# Altium PCB evacc_v3_1.PcbDoc (part 5 of 5)
Units mm, origin at the board's own origin, x right, y up, seen from the top; angles counter-clockwise.
Board outline 160 x 215 mm, 2 copper layers (Top Layer, Bottom Layer), stack 1.671 mm thick; 227 components, 143 nets, 622 pads, 320 vias.
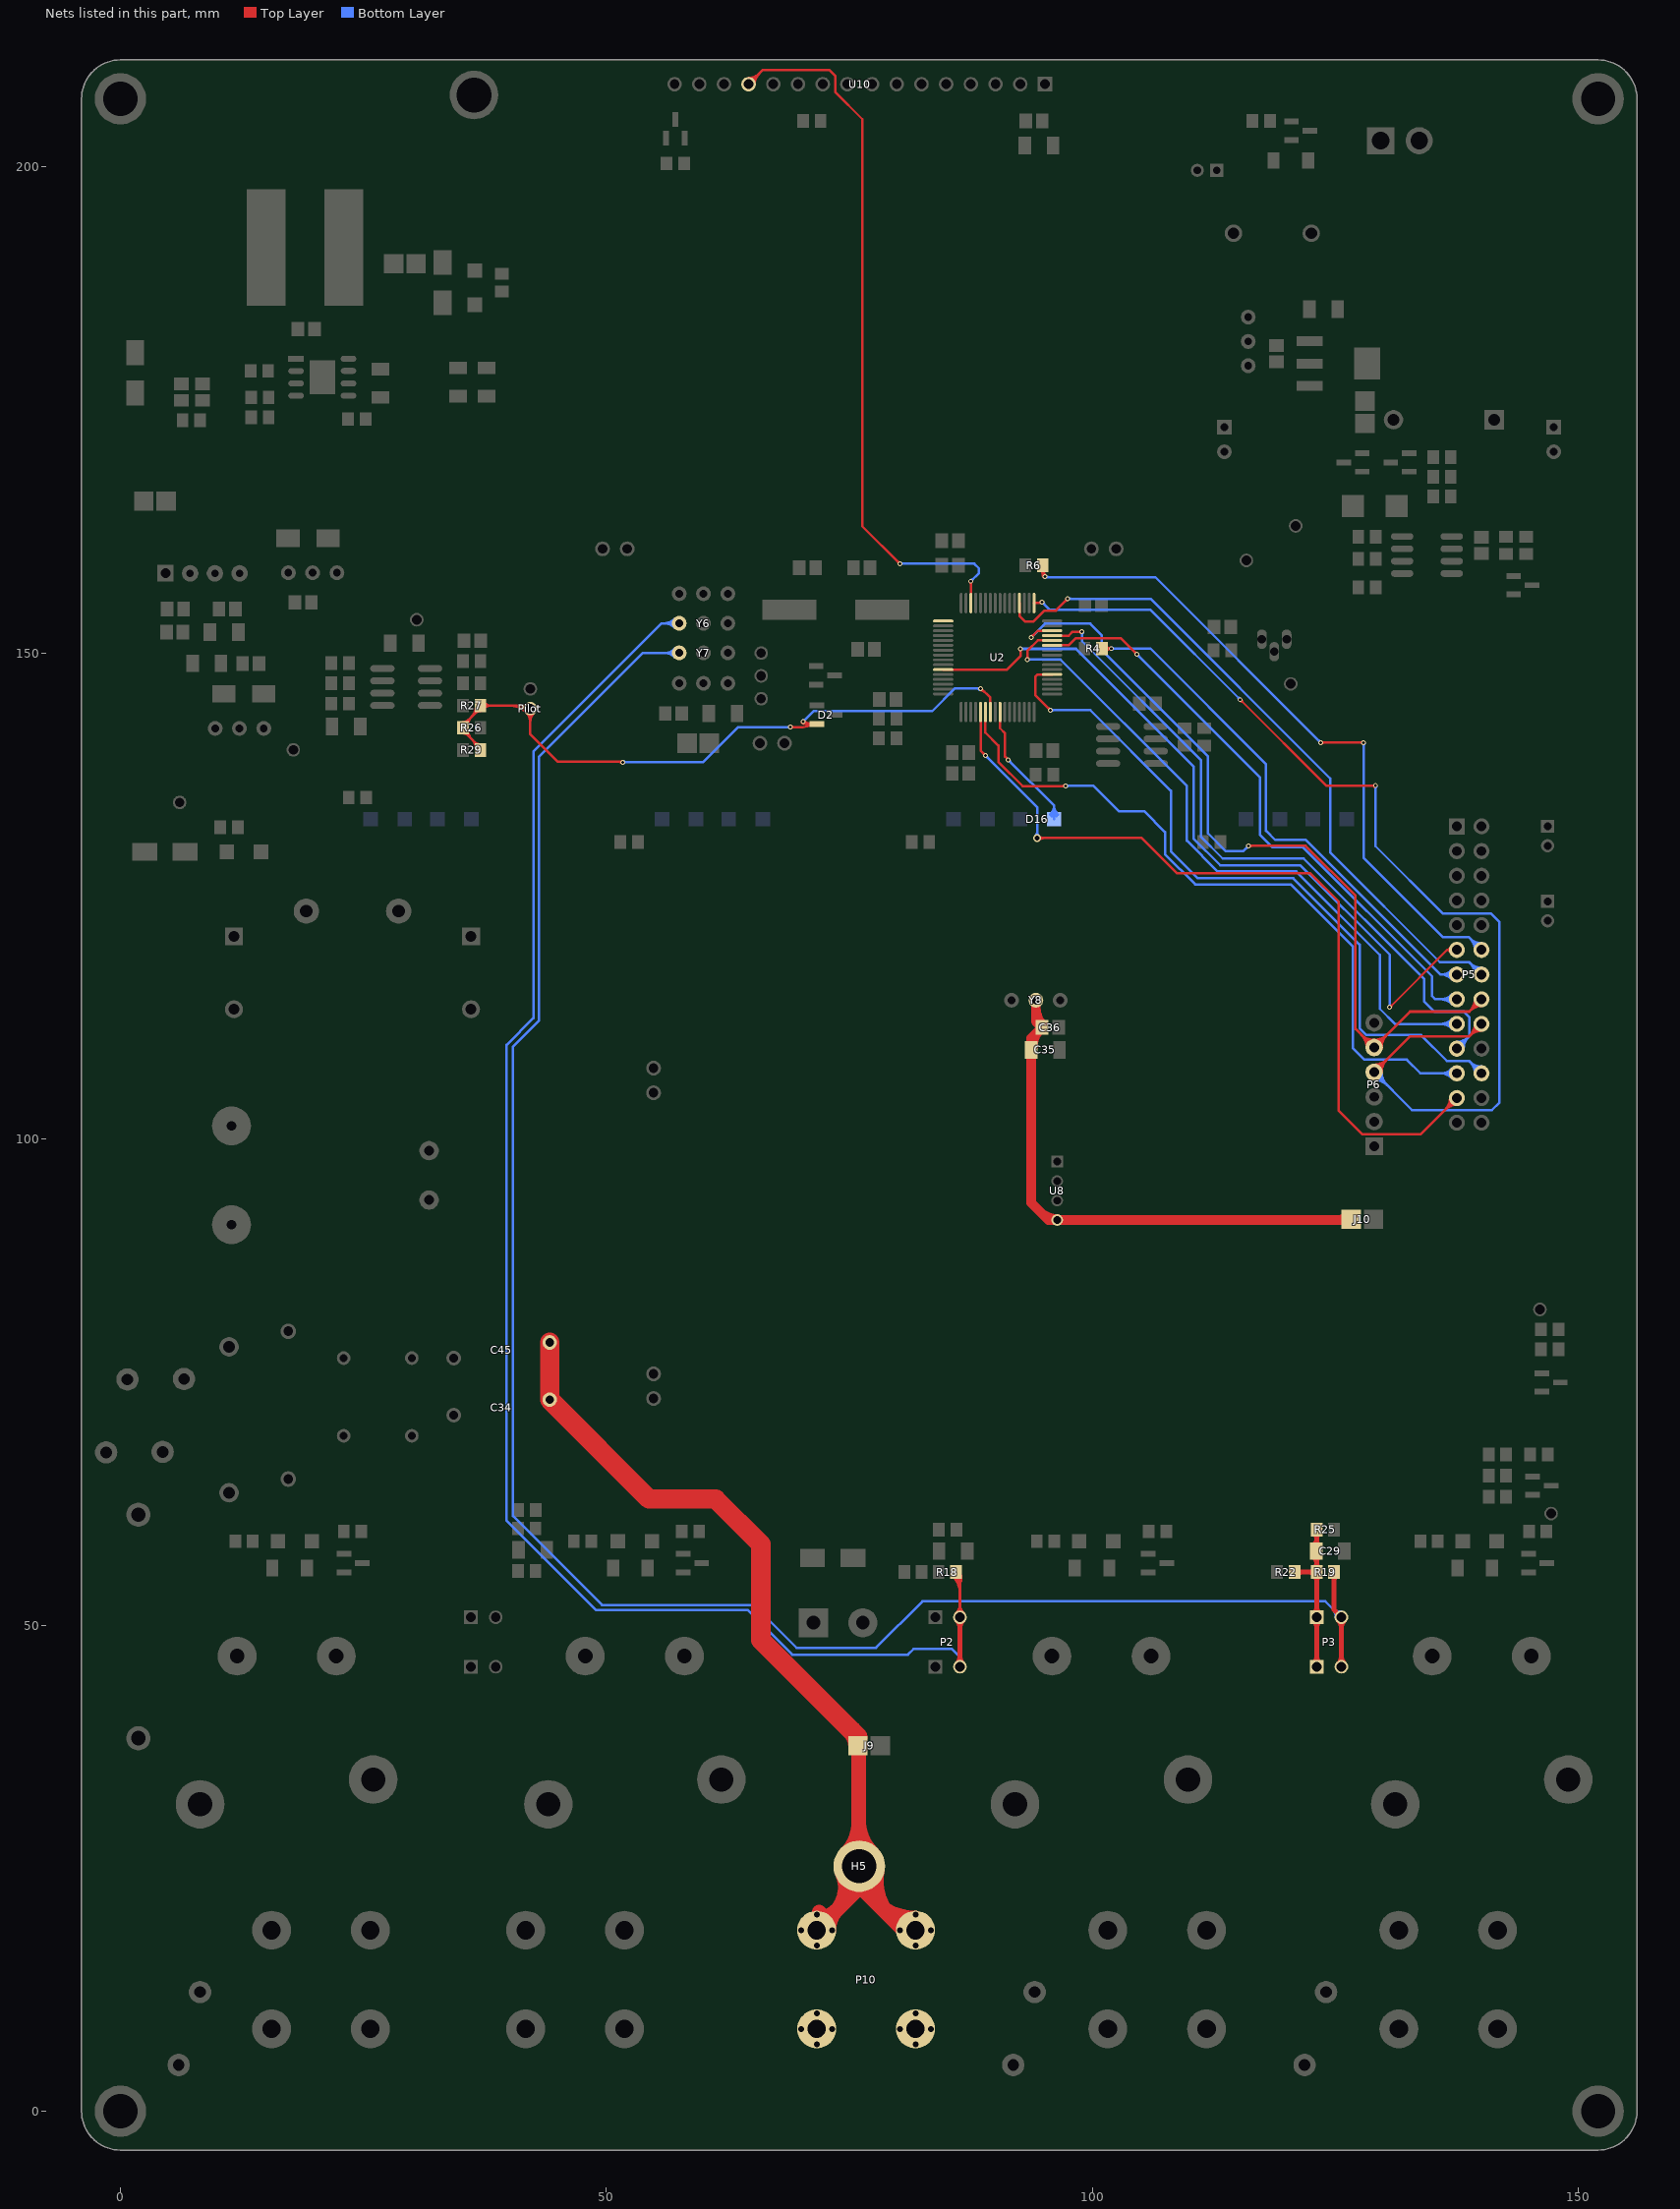
[diagram p5: the nets of this part, all layers, seen from the top]

## Via types
v1: diameter 0.8, hole 0.5, Top Layer to Bottom Layer, 150 vias
v2: diameter 0.8, hole 0.6, Top Layer to Bottom Layer, 80 vias
v3: diameter 0.5, hole 0.3, Top Layer to Bottom Layer, 53 vias
v4: diameter 1.27, hole 0.711, Top Layer to Bottom Layer, 20 vias
v5: diameter 1.2, hole 0.7, Top Layer to Bottom Layer, 13 vias
v6: diameter 1.2, hole 0.8, Top Layer to Bottom Layer, 4 vias

## Nets (pads, with @x,y where several pads share a name; then routed paths per layer and width w, separated by ;. In a path a pad name is that pad's centre, name@x,y a point inside that pad or via, vN(x,y) a via of type N, cw(c..) or ccw(c..) an arc to the next point about the centre after c; other vN are vias at no path point) (continued)
P2-: P2.2 R18.2 Y6.1 | length 199.7
  Top Layer w0.254: R18.2@85.581,55.45 85.772,55.259 86.36,54.671 P2.2@86.36,50.8 ; 86.36,51.57 cw(c85.59,51.57) 86.134,51.026 ccw(c85.59,51.57) 86.36,51.57 ; 86.36,51.57 ccw(c87.13,51.57) 86.586,51.026 cw(c87.13,51.57) 86.36,51.57 ; 86.36,52.183 cw(c84.977,52.183) 85.955,51.205 ccw(c84.977,52.183) 86.36,52.183 ; 86.36,52.183 ccw(c87.743,52.183) 86.765,51.205 cw(c87.743,52.183) 86.36,52.183 ; R18.2@85.628,55.016 cw(c83.859,53.247) 86.36,53.247 ccw(c83.859,53.247) R18.2@85.628,55.016 ; R18.2@85.807,55.195 cw(c84.473,53.86) 86.36,53.86 ccw(c84.473,53.86) R18.2@85.807,55.195 ; R18.2@85.987,55.375 cw(c85.086,54.474) 86.36,54.474 ccw(c85.086,54.474) R18.2@85.987,55.375
  Top Layer w0.5: R18.2@85.962,55.45 86.36,55.052 86.36,54.671 ; P2.2@86.36,45.72 P2.2@86.36,50.8 ; 86.36,46.806 cw(c85.274,46.806) 86.042,46.038 ccw(c85.274,46.806) 86.36,46.806 ; 86.36,46.806 ccw(c87.446,46.806) 86.678,46.038 cw(c87.446,46.806) 86.36,46.806 ; 86.36,49.714 cw(c87.446,49.714) 86.678,50.482 ccw(c87.446,49.714) 86.36,49.714 ; 86.36,49.714 ccw(c85.274,49.714) 86.042,50.482 cw(c85.274,49.714) 86.36,49.714 ; R18.2@85.944,55 cw(c85.922,54.563) 86.36,54.563 ccw(c85.922,54.563) R18.2@85.944,55
  Bottom Layer w0.254: Y6.1@57.483,153.048 55.69,153.048 42.483,139.841 42.483,112.435 39.726,109.677 39.726,60.731 48.895,51.562 64.516,51.562 69.113,46.965 81.001,46.965 81.585,47.549 85.547,47.549 86.36,46.736 ; P2.2@86.36,45.72 86.36,46.736 ; 55.95,153.048 cw(c55.95,151.515) 57.034,152.599 ccw(c55.95,151.515) 55.95,153.048 ; 55.95,153.048 ccw(c55.95,154.581) 57.034,153.497 cw(c55.95,154.581) 55.95,153.048 ; 56.563,153.048 cw(c56.563,152.128) 57.213,152.779 ccw(c56.563,152.128) 56.563,153.048 ; 56.563,153.048 ccw(c56.563,153.968) 57.213,153.318 cw(c56.563,153.968) 56.563,153.048 ; 86.36,46.736 cw(c85.746,46.736) 86.064,46.21 ccw(c85.746,46.736) 86.36,46.736 ; 86.36,46.736 ccw(c86.974,46.736) 86.656,46.21 cw(c86.974,46.736) 86.36,46.736
P3+: C29.2 P3.1 R19.1 R22.1 R25.2 | length 52.5
  Top Layer w0.254: C29.2@123.01,57.609 123.01,56.533 ; R19.1@123.052,55.45 123.052,56.491 ; 123.01,56.533 cw(c123.4,56.533) 123.233,56.886 ccw(c123.4,56.533) 123.01,56.533 ; 123.01,56.533 ccw(c122.62,56.533) 122.787,56.886 cw(c122.62,56.533) 123.01,56.533 ; 123.01,56.533 123.052,56.491 ; 123.052,56.491 cw(c122.352,56.491) 122.77,55.929 ccw(c122.352,56.491) 123.052,56.491 ; 123.052,56.491 ccw(c123.752,56.491) 123.334,55.929 cw(c123.752,56.491) 123.052,56.491
  Top Layer w0.5: R22.1@120.788,55.45 R19.1@123.052,55.45 ; P3.1@123.063,45.72 P3.1@123.063,50.8 123.063,55.45 123.063,57.609 R25.2@123.063,59.806 ; 121.633,55.45 cw(c121.633,56.295) 121.036,55.697 ccw(c121.633,56.295) 121.633,55.45 ; 121.633,55.45 ccw(c121.633,54.605) 121.036,55.202 cw(c121.633,54.605) 121.633,55.45 ; 122.207,55.45 cw(c122.207,54.605) 122.804,55.202 ccw(c122.207,54.605) 122.207,55.45 ; 122.207,55.45 ccw(c122.207,56.295) 122.804,55.697 cw(c122.207,56.295) 122.207,55.45 ; 123.063,46.806 cw(c121.977,46.806) 122.745,46.038 ccw(c121.977,46.806) 123.063,46.806 ; 123.063,46.806 ccw(c124.149,46.806) 123.381,46.038 cw(c124.149,46.806) 123.063,46.806 ; 123.063,49.714 cw(c124.149,49.714) 123.381,50.482 ccw(c124.149,49.714) 123.063,49.714 ; 123.063,49.714 ccw(c121.977,49.714) 122.745,50.482 cw(c121.977,49.714) 123.063,49.714 ; 123.063,51.886 cw(c121.977,51.886) 122.745,51.118 ccw(c121.977,51.886) 123.063,51.886 ; 123.063,51.886 ccw(c124.149,51.886) 123.381,51.118 cw(c124.149,51.886) 123.063,51.886 ; C29.2@122.727,57.076 cw(c121.916,56.265) 123.063,56.265 ccw(c121.916,56.265) C29.2@122.727,57.076 ; C29.2@122.727,58.142 ccw(c121.916,58.953) 123.063,58.953 cw(c121.916,58.953) C29.2@122.727,58.142 ; R19.1@122.804,55.102 cw(c122.18,54.478) 123.063,54.478 ccw(c122.18,54.478) R19.1@122.804,55.102 ; R19.1@122.804,55.797 ccw(c122.18,56.422) 123.063,56.422 cw(c122.18,56.422) R19.1@122.804,55.797 ; R25.2@122.804,59.47 cw(c122.18,58.845) 123.063,58.845 ccw(c122.18,58.845) R25.2@122.804,59.47 ; 123.063,54.532 cw(c123.87,54.532) 123.299,55.102 ccw(c123.87,54.532) 123.063,54.532 ; 123.063,56.368 ccw(c123.87,56.368) 123.299,55.797 cw(c123.87,56.368) 123.063,56.368 ; 123.063,56.521 cw(c123.848,56.521) 123.293,57.076 ccw(c123.848,56.521) 123.063,56.521 ; 123.063,58.697 ccw(c123.848,58.697) 123.293,58.142 cw(c123.848,58.697) 123.063,58.697 ; 123.063,58.899 cw(c123.87,58.899) 123.299,59.47 ccw(c123.87,58.899) 123.063,58.899
P3-: P3.2 R19.2 Y7.1 | length 225.5
  Top Layer w0.5: R19.2@124.852,55.45 124.852,51.551 P3.2@125.603,50.8 P3.2@125.603,45.72 ; 124.852,54.505 cw(c125.697,54.505) 125.1,55.102 ccw(c125.697,54.505) 124.852,54.505 ; 124.852,54.505 ccw(c124.007,54.505) 124.605,55.102 cw(c124.007,54.505) 124.852,54.505 ; 125.603,46.806 cw(c124.517,46.806) 125.285,46.038 ccw(c124.517,46.806) 125.603,46.806 ; 125.603,46.806 ccw(c126.689,46.806) 125.921,46.038 cw(c126.689,46.806) 125.603,46.806 ; 125.603,49.714 cw(c126.689,49.714) 125.921,50.482 ccw(c126.689,49.714) 125.603,49.714 ; 125.603,49.714 ccw(c124.517,49.714) 125.285,50.482 cw(c124.517,49.714) 125.603,49.714
  Bottom Layer w0.254: Y7.1@57.483,150 53.734,150 43.04,139.306 43.04,112.154 40.386,109.499 40.386,61.214 49.53,52.07 65.151,52.07 69.545,47.676 77.724,47.676 82.499,52.451 123.952,52.451 P3.2@125.603,50.8 ; 55.95,150 cw(c55.95,148.467) 57.034,149.551 ccw(c55.95,148.467) 55.95,150 ; 55.95,150 ccw(c55.95,151.533) 57.034,150.449 cw(c55.95,151.533) 55.95,150 ; 56.563,150 cw(c56.563,149.08) 57.213,149.731 ccw(c56.563,149.08) 56.563,150 ; 56.563,150 ccw(c56.563,150.92) 57.213,150.27 cw(c56.563,150.92) 56.563,150 ; 124.625,51.778 cw(c123.647,50.8) 125.03,50.8 ccw(c123.647,50.8) 124.625,51.778 ; 124.625,51.778 ccw(c125.603,52.756) 125.603,51.373 cw(c125.603,52.756) 124.625,51.778 ; 125.058,51.345 cw(c124.514,50.8) 125.284,50.8 ccw(c124.514,50.8) 125.058,51.345 ; 125.058,51.345 ccw(c125.603,51.889) 125.603,51.119 cw(c125.603,51.889) 125.058,51.345
PE: C34.2 C45.1 H5.0 J9.2 P10.1 P10.2 | length 170.4
  Top Layer w1: J9.2@75.863,37.592 J9.2@75.863,38.488
  Top Layer w1.5: P10.1@71.629,18.62 72.429,19.42 H5.0@75.946,22.937 ; J9.2@75.863,37.592 75.946,37.668 75.946,37.592 75.946,25.2 75.946,23.241 80.378,18.809 80.567,18.62 P10.2@81.789,18.62 ; P10.1@71.629,19.87 ccw(c71.629,22.888) 73.762,20.754 ; P10.1@71.629,19.87 ccw(c71.629,22.888) 73.762,20.754 ; P10.1@71.629,19.87 ccw(c71.629,22.888) 73.762,20.754 ; P10.1@71.629,19.87 ccw(c71.629,22.888) 73.762,20.754 ; P10.1@71.876,20.467 cw(c70.542,19.134) P10.1@72.429,19.134 ; P10.1@71.876,20.467 cw(c70.542,19.134) P10.1@72.429,19.134 ; P10.1@71.876,20.467 cw(c70.542,19.134) P10.1@72.429,19.134 ; P10.1@71.876,20.467 cw(c70.542,19.134) P10.1@72.429,19.134 ; P10.1@72.879,18.62 cw(c75.896,18.62) 73.762,20.754 ; P10.1@72.879,18.62 cw(c75.896,18.62) 73.762,20.754 ; P10.1@72.879,18.62 cw(c75.896,18.62) 73.762,20.754 ; P10.1@72.879,18.62 cw(c75.896,18.62) 73.762,20.754 ; 73.533,20.524 ccw(c71.047,23.01) 74.262,24.432 cw(c71.047,23.01) 73.533,20.524 ; H5.0@74.656,26.544 ccw(c71.543,29.657) 75.946,29.657 cw(c71.543,29.657) H5.0@74.656,26.544 ; 75.08,22.072 ccw(c73.193,23.959) 75.634,25.038 cw(c73.193,23.959) 75.08,22.072 ; 75.946,29.917 ccw(c80.717,29.917) 77.344,26.544 cw(c80.717,29.917) 75.946,29.917 ; H5.0@76.392,25.121 ccw(c79.994,24.391) 77.395,21.792 cw(c79.994,24.391) H5.0@76.392,25.121 ; 77.57,21.618 ccw(c81.788,25.837) 81.789,19.87 cw(c81.788,25.837) 77.57,21.618 ; H5.0@77.862,24.823 ccw(c83.28,23.725) 79.371,19.816 cw(c83.28,23.725) H5.0@77.862,24.823
  Top Layer w2: C45.1@44.161,79.07 C34.2@44.161,73.19 54.385,62.967 61.239,62.967 65.888,58.318 65.888,48.463 J9.2@75.863,38.488 ; 75.229,39.122 cw(c73.7,37.592) J9.2@75.863,37.592
  other v2: 71.629,6.86 81.789,6.86 70.029,8.46 73.229,8.46 80.189,8.46 83.389,8.46 71.629,10.06 81.789,10.06 71.629,17.02 81.789,17.02 70.029,18.62 73.229,18.62 80.189,18.62 83.389,18.62 71.629,20.22 81.789,20.22
PILOT: D2.2 Pilot.1 R26.1 R27.2 R29.2 U2.23 | length 133.1
  Top Layer w0.254: R29.2@37.031,140.017 37.031,140.236 35.231,142.036 R26.1@35.231,142.303 R26.1@35.231,142.521 ; R27.2@37.031,144.589 R27.2@37.031,144.346 ; v3(51.689,138.76) 51.689,138.802 51.68,138.811 44.983,138.811 42.164,141.63 Pilot.1@42.164,144.272 41.847,144.589 37.274,144.589 37.153,144.468 R27.2@37.031,144.346 ; v3(68.935,142.369) 70.216,142.369 D2.2@71.633,142.687 70.457,142.687 v3(70.216,142.928) ; v3(88.468,146.304) 88.585,146.304 89.484,145.405 U2.23@89.484,143.932 ; R26.1@35.231,142.521 35.231,142.546 R27.2@37.031,144.346 ; R26.1@35.231,142.521 37.031,144.321 R27.2@37.031,144.346 ; R26.1@35.231,142.876 ccw(c35.231,143.733) 35.837,143.127 cw(c35.231,143.733) R26.1@35.231,142.876 ; R26.1@35.231,142.876 ccw(c35.231,143.673) 35.794,143.109 cw(c35.231,143.673) R26.1@35.231,142.876 ; R26.1@35.45,142.403 cw(c36.264,142.403) 35.688,142.979 ccw(c36.264,142.403) R26.1@35.45,142.403 ; R26.1@35.45,142.403 cw(c36.324,142.403) 35.706,143.021 ccw(c36.324,142.403) R26.1@35.45,142.403 ; R26.1@35.704,142.403 cw(c37.131,142.403) 36.122,143.412 ccw(c37.131,142.403) R26.1@35.704,142.403 ; R26.1@35.704,142.403 cw(c37.191,142.403) 36.14,143.455 ccw(c37.191,142.403) R26.1@35.704,142.403 ; R27.2@36.558,144.489 cw(c35.011,144.489) 36.105,143.395 ccw(c35.011,144.489) R27.2@36.558,144.489 ; R27.2@36.558,144.489 cw(c35.071,144.489) 36.122,143.437 ccw(c35.071,144.489) R27.2@36.558,144.489 ; R27.2@36.812,144.489 cw(c35.878,144.489) 36.538,143.829 ccw(c35.878,144.489) R27.2@36.812,144.489 ; R27.2@36.812,144.489 cw(c35.938,144.489) 36.556,143.871 ccw(c35.938,144.489) R27.2@36.812,144.489 ; R27.2@37.031,144.016 ccw(c37.031,143.279) 36.51,143.8 cw(c37.031,143.279) R27.2@37.031,144.016 ; R27.2@37.031,144.016 ccw(c37.031,143.219) 36.468,143.783 cw(c37.031,143.219) R27.2@37.031,144.016 ; 38.173,144.589 cw(c38.173,145.731) 37.365,144.924 ccw(c38.173,145.731) 38.173,144.589 ; 38.173,144.589 ccw(c38.173,143.447) 37.365,144.255 cw(c38.173,143.447) 38.173,144.589 ; Pilot.1@41.759,143.867 ccw(c40.015,142.123) 40.015,144.589 cw(c40.015,142.123) Pilot.1@41.759,143.867 ; Pilot.1@41.759,143.867 cw(c40.781,142.889) 42.164,142.889 ; Pilot.1@41.759,143.867 cw(c40.781,142.889) 42.164,142.889 ; Pilot.1@41.938,144.046 ccw(c40.628,142.736) 40.628,144.589 cw(c40.628,142.736) Pilot.1@41.938,144.046 ; Pilot.1@41.938,144.046 cw(c41.394,143.502) 42.164,143.502 ; Pilot.1@41.938,144.046 cw(c41.394,143.502) 42.164,143.502 ; 42.164,142.889 cw(c43.547,142.889) 42.569,143.867 ccw(c43.547,142.889) 42.164,142.889 ; 42.164,143.502 cw(c42.934,143.502) 42.39,144.046 ccw(c42.934,143.502) 42.164,143.502 ; 69.232,142.369 cw(c69.232,142.666) 69.022,142.456 ccw(c69.232,142.666) 69.232,142.369 ; 69.232,142.369 ccw(c69.232,142.072) 69.022,142.282 cw(c69.232,142.072) 69.232,142.369 ; 70.765,142.687 cw(c70.765,142.269) 71.061,142.565 ccw(c70.765,142.269) 70.765,142.687 ; 70.765,142.687 ccw(c70.765,143.105) 71.061,142.809 cw(c70.765,143.105) 70.765,142.687 ; R26.1@35.231,141.73 cw(c35.231,140.992) 35.753,141.514 ccw(c35.231,140.992) R26.1@35.231,141.73 ; R26.1@35.45,142.203 ccw(c36.383,142.203) 35.723,141.543 cw(c36.383,142.203) R26.1@35.45,142.203 ; R26.1@35.704,142.203 ccw(c37.25,142.203) 36.157,141.11 cw(c37.25,142.203) R26.1@35.704,142.203 ; 36.14,141.127 cw(c35.13,140.117) 36.558,140.117 ccw(c35.13,140.117) 36.14,141.127 ; 36.426,140.841 ccw(c37.031,141.446) 37.031,140.59 cw(c37.031,141.446) 36.426,140.841 ; R29.2@36.573,140.693 cw(c35.997,140.117) 36.812,140.117 ccw(c35.997,140.117) R29.2@36.573,140.693 ; 41.242,144.589 cw(c41.242,143.35) 42.118,144.226 ccw(c41.242,143.35) 41.242,144.589 ; 51.269,138.811 cw(c51.269,138.341) 51.602,138.673 ccw(c51.269,138.341) 51.269,138.811 ; v3@70.123,142.835 ccw(c70.481,143.192) 70.481,142.687 cw(c70.481,143.192) v3@70.123,142.835 ; v3@70.303,143.015 ccw(c71.094,143.805) 71.094,142.687 cw(c71.094,143.805) v3@70.303,143.015 ; 70.565,142.447 ccw(c70.4,143.183) 71.037,142.78 cw(c70.4,143.183) 70.565,142.447 ; v3@88.468,146.181 cw(c88.468,145.603) 88.877,146.012 ccw(c88.468,145.603) v3@88.468,146.181
  Bottom Layer w0.254: v3(51.689,138.76) 59.93,138.76 63.539,142.369 v3(68.935,142.369) ; v3(70.216,142.928) 71.306,144.018 83.501,144.018 85.838,146.355 88.301,146.355 88.41,146.246 88.468,146.187 v3(88.468,146.304) ; 51.986,138.76 cw(c51.986,139.057) 51.776,138.847 ccw(c51.986,139.057) 51.986,138.76 ; 51.986,138.76 ccw(c51.986,138.463) 51.776,138.673 cw(c51.986,138.463) 51.986,138.76 ; 68.638,142.369 cw(c68.638,142.072) 68.848,142.282 ccw(c68.638,142.072) 68.638,142.369 ; 68.638,142.369 ccw(c68.638,142.666) 68.848,142.456 cw(c68.638,142.666) 68.638,142.369 ; 70.426,143.138 cw(c70.216,143.348) 70.216,143.051 ccw(c70.216,143.348) 70.426,143.138 ; 70.426,143.138 ccw(c70.636,142.928) 70.339,142.928 cw(c70.636,142.928) 70.426,143.138 ; 88.049,146.355 cw(c88.049,145.884) 88.381,146.217 ccw(c88.049,145.884) 88.049,146.355
READY: D16.2 U2.25 | length 20.9
  Top Layer w0.254: U2.25@90.484,143.932 90.484,142.252 91.008,141.728 91.008,139.335 v3(91.334,139.008)
  Bottom Layer w0.254: v3(91.334,139.008) 96.048,134.295 D16.2@96.048,132.906 ; 91.544,138.798 cw(c91.754,139.008) 91.457,139.008 ccw(c91.754,139.008) 91.544,138.798 ; 91.544,138.798 ccw(c91.334,138.588) 91.334,138.885 cw(c91.334,138.588) 91.544,138.798 ; 96.048,133.729 cw(c95.316,133.729) 95.803,133.182 ccw(c95.316,133.729) 96.048,133.729 ; 96.048,133.729 ccw(c96.78,133.729) 96.293,133.182 cw(c96.78,133.729) 96.048,133.729 ; 96.048,134.295 cw(c94.812,134.295) 95.634,133.371 ccw(c94.812,134.295) 96.048,134.295 ; 96.048,134.295 ccw(c97.284,134.295) 96.462,133.371 cw(c97.284,134.295) 96.048,134.295
RF-GND: C35.2 C36.2 J10.1 U8.4 Y8.2 | length 69.2
  Top Layer w1: Y8.2@94.202,114.304 Y8.2@94.172,114.275 94.172,112.115 C36.2@94.806,111.481 93.698,110.373 C35.2@93.698,109.169 93.698,93.423 95.453,91.669 U8.4@96.368,91.669 J10.1@126.612,91.669 ; 125.221,91.669 ccw(c125.221,93.136) J10.1@126.258,92.098 ; 125.589,91.669 cw(c125.589,90.722) J10.1@126.258,91.391 ; C35.2@93.848,109.419 cw(c96.512,109.419) 94.629,111.303 ccw(c96.512,109.419) C35.2@93.848,109.419 ; 94.172,113.473 ccw(c96.699,113.473) 94.912,111.687 cw(c96.699,113.473) 94.172,113.473 ; 94.636,92.486 ccw(c96.368,94.218) 96.368,91.769 cw(c96.368,94.218) 94.636,92.486
RS: U2.62 U10.13 | length 86.2
  Top Layer w0.254: U10.13@64.625,208.503 66.104,209.982 72.913,209.982 73.558,209.336 73.558,207.67 76.327,204.902 76.327,163.032 v3(80.176,159.184) ; U2.62@87.484,155.132 v3(87.484,157.373) ; 65.255,209.133 cw(c64.625,209.763) 64.625,208.872 ccw(c64.625,209.763) 65.255,209.133 ; 65.255,209.133 ccw(c65.885,208.503) 64.994,208.503 cw(c65.885,208.503) 65.255,209.133 ; 65.689,209.567 cw(c64.625,210.63) 64.625,209.126 ccw(c64.625,210.63) 65.689,209.567 ; 65.689,209.567 ccw(c66.752,208.503) 65.248,208.503 cw(c66.752,208.503) 65.689,209.567 ; 79.966,159.394 cw(c79.756,159.184) 80.053,159.184 ccw(c79.756,159.184) 79.966,159.394 ; 79.966,159.394 ccw(c80.176,159.604) 80.176,159.307 cw(c80.176,159.604) 79.966,159.394 ; 87.484,157.076 cw(c87.781,157.076) 87.571,157.286 ccw(c87.781,157.076) 87.484,157.076 ; 87.484,157.076 ccw(c87.187,157.076) 87.397,157.286 cw(c87.187,157.076) 87.484,157.076
  Bottom Layer w0.254: v3(80.176,159.184) 87.831,159.184 88.329,158.686 88.329,158.218 v3(87.484,157.373) ; 80.473,159.184 cw(c80.473,159.481) 80.263,159.271 ccw(c80.473,159.481) 80.473,159.184 ; 80.473,159.184 ccw(c80.473,158.887) 80.263,159.097 cw(c80.473,158.887) 80.473,159.184 ; 87.694,157.583 cw(c87.484,157.793) 87.484,157.496 ccw(c87.484,157.793) 87.694,157.583 ; 87.694,157.583 ccw(c87.904,157.373) 87.607,157.373 cw(c87.904,157.373) 87.694,157.583
SWCLK: P5.18 P6.4 U2.49 | length 145.7
  Top Layer w0.254: U2.49@93.984,155.132 94.748,155.132 94.818,155.202 v3(94.818,155.245) ; v3(115.202,145.188) 124.043,136.347 v3(129.108,136.347) ; P6.4@128.969,106.871 132.664,110.566 138.746,110.566 P5.18@140.018,111.838 ; 115.412,144.978 cw(c115.622,145.188) 115.325,145.188 ccw(c115.622,145.188) 115.412,144.978 ; 115.412,144.978 ccw(c115.202,144.768) 115.202,145.065 cw(c115.202,144.768) 115.412,144.978 ; 128.811,136.347 cw(c128.811,136.05) 129.021,136.26 ccw(c128.811,136.05) 128.811,136.347 ; 128.811,136.347 ccw(c128.811,136.644) 129.021,136.434 cw(c128.811,136.644) 128.811,136.347 ; 129.855,107.757 cw(c128.969,108.643) 128.969,107.39 ccw(c128.969,108.643) 129.855,107.757 ; 129.855,107.757 ccw(c130.741,106.871) 129.488,106.871 cw(c130.741,106.871) 129.855,107.757 ; 130.289,108.191 cw(c128.969,109.51) 128.969,107.644 ccw(c128.969,109.51) 130.289,108.191 ; 130.289,108.191 ccw(c131.608,106.871) 129.742,106.871 cw(c131.608,106.871) 130.289,108.191 ; 138.826,110.646 cw(c140.018,109.455) 140.018,111.14 ccw(c140.018,109.455) 138.826,110.646 ; 138.826,110.646 ccw(c137.635,111.838) 139.32,111.838 cw(c137.635,111.838) 138.826,110.646 ; 139.26,111.08 cw(c140.018,110.322) 140.018,111.394 ccw(c140.018,110.322) 139.26,111.08 ; 139.26,111.08 ccw(c138.502,111.838) 139.574,111.838 cw(c138.502,111.838) 139.26,111.08 ; 94.249,155.132 ccw(c94.249,155.814) 94.731,155.332 cw(c94.249,155.814) 94.249,155.132
  Bottom Layer w0.254: v3(94.818,155.245) 95.629,154.434 105.957,154.434 v3(115.202,145.188) ; P6.4@128.969,106.871 132.868,102.972 141.083,102.972 141.859,103.748 141.859,122.326 140.974,123.211 136.021,123.211 129.108,130.124 v3(129.108,136.347) ; 95.028,155.035 cw(c95.238,155.245) 94.941,155.245 ccw(c95.238,155.245) 95.028,155.035 ; 95.028,155.035 ccw(c94.818,154.825) 94.818,155.122 cw(c94.818,154.825) 95.028,155.035 ; 114.992,145.398 cw(c114.782,145.188) 115.079,145.188 ccw(c114.782,145.188) 114.992,145.398 ; 114.992,145.398 ccw(c115.202,145.608) 115.202,145.311 cw(c115.202,145.608) 114.992,145.398 ; 129.108,136.05 cw(c129.405,136.05) 129.195,136.26 ccw(c129.405,136.05) 129.108,136.05 ; 129.108,136.05 ccw(c128.811,136.05) 129.021,136.26 cw(c128.811,136.05) 129.108,136.05 ; 129.855,105.985 cw(c130.741,106.871) 129.488,106.871 ccw(c130.741,106.871) 129.855,105.985 ; 129.855,105.985 ccw(c128.969,105.099) 128.969,106.352 cw(c128.969,105.099) 129.855,105.985 ; 130.289,105.551 cw(c131.608,106.871) 129.742,106.871 ccw(c131.608,106.871) 130.289,105.551 ; 130.289,105.551 ccw(c128.969,104.232) 128.969,106.098 cw(c128.969,104.232) 130.289,105.551
SWDIO: P5.16 P6.5 U2.46 | length 115.5
  Top Layer w0.254: v3(93.675,151.587) 94.37,152.282 U2.46@95.834,152.282 ; v3(116.053,130.15) 121.92,130.15 127.051,125.019 127.051,111.329 P6.5@128.969,109.411 132.664,113.106 138.746,113.106 P5.16@140.018,114.378 ; 93.885,151.797 cw(c93.675,152.007) 93.675,151.71 ccw(c93.675,152.007) 93.885,151.797 ; 93.885,151.797 ccw(c94.095,151.587) 93.798,151.587 cw(c94.095,151.587) 93.885,151.797 ; 116.35,130.15 cw(c116.35,130.447) 116.14,130.237 ccw(c116.35,130.447) 116.35,130.15 ; 116.35,130.15 ccw(c116.35,129.853) 116.14,130.063 cw(c116.35,129.853) 116.35,130.15 ; 127.649,110.731 cw(c126.33,109.411) 128.196,109.411 ccw(c126.33,109.411) 127.649,110.731 ; 127.649,110.731 ccw(c128.969,112.05) P6.5@128.969,110.184 ; 127.649,110.731 ccw(c128.969,112.05) P6.5@128.969,110.184 ; 128.083,110.297 cw(c127.197,109.411) 128.45,109.411 ccw(c127.197,109.411) 128.083,110.297 ; 128.083,110.297 ccw(c128.969,111.183) P6.5@128.969,109.93 ; 128.083,110.297 ccw(c128.969,111.183) P6.5@128.969,109.93 ; P6.5@128.969,109.93 ccw(c128.969,111.183) 129.855,110.297 ; P6.5@128.969,109.93 ccw(c128.969,111.183) 129.855,110.297 ; P6.5@128.969,110.184 ccw(c128.969,112.05) 130.289,110.731 ; P6.5@128.969,110.184 ccw(c128.969,112.05) 130.289,110.731 ; 129.855,110.297 ccw(c130.741,109.411) 129.488,109.411 cw(c130.741,109.411) 129.855,110.297 ; 130.289,110.731 ccw(c131.608,109.411) 129.742,109.411 cw(c131.608,109.411) 130.289,110.731 ; 138.826,113.186 cw(c140.018,111.995) 140.018,113.68 ccw(c140.018,111.995) 138.826,113.186 ; 138.826,113.186 ccw(c137.635,114.378) 139.32,114.378 cw(c137.635,114.378) 138.826,113.186 ; 139.26,113.62 cw(c140.018,112.862) 140.018,113.934 ccw(c140.018,112.862) 139.26,113.62 ; 139.26,113.62 ccw(c138.502,114.378) 139.574,114.378 cw(c138.502,114.378) 139.26,113.62
  Bottom Layer w0.254: v3(93.675,151.587) 95.098,153.01 99.761,153.01 100.965,151.805 100.965,150.265 111.874,139.356 111.874,131.433 113.716,129.591 115.494,129.591 v3(116.053,130.15) ; 93.885,151.797 cw(c93.675,152.007) 93.675,151.71 ccw(c93.675,152.007) 93.885,151.797 ; 93.885,151.797 ccw(c94.095,151.587) 93.798,151.587 cw(c94.095,151.587) 93.885,151.797 ; 115.843,129.94 cw(c116.053,129.73) 116.053,130.027 ccw(c116.053,129.73) 115.843,129.94 ; 115.843,129.94 ccw(c115.633,130.15) 115.93,130.15 cw(c115.633,130.15) 115.843,129.94
U1_RESET: P5.22 U2.37 | length 84.9
  Top Layer w0.254: v3(95.682,144.109) 94.107,145.684 94.107,147.549 94.34,147.782 U2.37@95.834,147.782 ; 95.472,144.319 cw(c95.262,144.109) 95.559,144.109 ccw(c95.262,144.109) 95.472,144.319 ; 95.472,144.319 ccw(c95.682,144.529) 95.682,144.232 cw(c95.682,144.529) 95.472,144.319
  Bottom Layer w0.254: v3(95.682,144.109) 99.782,144.109 108.061,135.83 108.061,129.607 110.846,126.822 120.65,126.822 127.483,119.99 127.483,111.369 128.156,110.695 133.786,110.695 136.453,108.028 138.748,108.028 P5.22@140.018,106.758 ; 95.979,144.109 cw(c95.979,144.406) 95.769,144.196 ccw(c95.979,144.406) 95.979,144.109 ; 95.979,144.109 ccw(c95.979,143.812) 95.769,144.022 cw(c95.979,143.812) 95.979,144.109 ; 138.826,107.95 cw(c137.635,106.758) 139.32,106.758 ccw(c137.635,106.758) 138.826,107.95 ; 138.826,107.95 ccw(c140.018,109.141) 140.018,107.456 cw(c140.018,109.141) 138.826,107.95 ; 139.26,107.516 cw(c138.502,106.758) 139.574,106.758 ccw(c138.502,106.758) 139.26,107.516 ; 139.26,107.516 ccw(c140.018,108.274) 140.018,107.202 cw(c140.018,108.274) 139.26,107.516
U1_RXD: P5.14 U2.52 | length 81.1
  Top Layer w0.254: U2.52@92.484,155.132 92.484,153.82 93.091,153.213 93.904,153.213 95.047,154.356 96.227,154.356 v3(97.448,155.577) ; 97.238,155.367 cw(c97.448,155.157) 97.448,155.454 ccw(c97.448,155.157) 97.238,155.367 ; 97.238,155.367 ccw(c97.028,155.577) 97.325,155.577 cw(c97.028,155.577) 97.238,155.367
  Bottom Layer w0.254: v3(97.448,155.577) 105.957,155.577 124.435,137.099 124.435,129.489 135.736,118.188 138.748,118.188 P5.14@140.018,116.918 ; 97.745,155.577 cw(c97.745,155.874) 97.535,155.664 ccw(c97.745,155.874) 97.745,155.577 ; 97.745,155.577 ccw(c97.745,155.28) 97.535,155.49 cw(c97.745,155.28) 97.745,155.577 ; 138.826,118.11 cw(c137.635,116.918) 139.32,116.918 ccw(c137.635,116.918) 138.826,118.11 ; 138.826,118.11 ccw(c140.018,119.301) 140.018,117.616 cw(c140.018,119.301) 138.826,118.11 ; 139.26,117.676 cw(c138.502,116.918) 139.574,116.918 ccw(c138.502,116.918) 139.26,117.676 ; 139.26,117.676 ccw(c140.018,118.434) 140.018,117.362 cw(c140.018,118.434) 139.26,117.676
U1_TXD: P5.12 R6.2 | length 86.7
  Top Layer w0.254: R6.2@94.88,159.004 94.88,158.079 ; v3(95.098,157.861) 94.88,158.079 ; v3(123.483,140.769) 127.887,140.769 v3(127.889,140.767) ; 94.88,158.079 cw(c95.364,158.079) 95.119,158.496 ccw(c95.364,158.079) 94.88,158.079 ; 94.88,158.079 ccw(c94.396,158.079) 94.641,158.496 cw(c94.396,158.079) 94.88,158.079 ; 123.78,140.769 cw(c123.78,141.066) 123.57,140.856 ccw(c123.78,141.066) 123.78,140.769 ; 123.78,140.769 ccw(c123.78,140.472) 123.57,140.682 cw(c123.78,140.472) 123.78,140.769 ; 94.88,158.07 ccw(c95.307,158.07) 95.005,157.768 cw(c95.307,158.07) 94.88,158.07 ; R6.2@94.88,158.683 ccw(c95.92,158.683) 95.185,157.948 cw(c95.92,158.683) R6.2@94.88,158.683 ; 127.588,140.769 cw(c127.588,140.466) 127.802,140.68 ccw(c127.588,140.466) 127.588,140.769 ; 127.596,140.769 ccw(c127.596,141.059) 127.802,140.854 cw(c127.596,141.059) 127.596,140.769
  Bottom Layer w0.254: v3(95.098,157.861) 95.03,157.793 95.098,157.793 106.458,157.793 v3(123.483,140.769) ; v3(127.889,140.767) 127.889,128.93 136.068,120.752 138.724,120.752 P5.12@140.018,119.458 ; 123.273,140.979 cw(c123.063,140.769) 123.36,140.769 ccw(c123.063,140.769) 123.273,140.979 ; 123.273,140.979 ccw(c123.483,141.189) 123.483,140.892 cw(c123.483,141.189) 123.273,140.979 ; 127.889,140.47 cw(c128.186,140.47) 127.976,140.68 ccw(c128.186,140.47) 127.889,140.47 ; 127.889,140.47 ccw(c127.592,140.47) 127.802,140.68 cw(c127.592,140.47) 127.889,140.47 ; 138.826,120.65 cw(c137.635,119.458) 139.32,119.458 ccw(c137.635,119.458) 138.826,120.65 ; 138.826,120.65 ccw(c140.018,121.841) 140.018,120.156 cw(c140.018,121.841) 138.826,120.65 ; 139.26,120.216 cw(c138.502,119.458) 139.574,119.458 ccw(c138.502,119.458) 139.26,120.216 ; 139.26,120.216 ccw(c140.018,120.974) 140.018,119.902 cw(c140.018,120.974) 139.26,120.216 ; v3@95.185,157.948 ccw(c95.558,158.321) 95.558,157.793 cw(c95.558,158.321) v3@95.185,157.948
U2-CTS: P5.17 U2.44 | length 80.6
  Top Layer w0.254: v3(93.307,149.328) 93.307,150.215 94.374,151.282 U2.44@95.834,151.282 ; 93.307,149.625 cw(c93.01,149.625) 93.22,149.415 ccw(c93.01,149.625) 93.307,149.625 ; 93.307,149.625 ccw(c93.604,149.625) 93.394,149.415 cw(c93.604,149.625) 93.307,149.625
  Bottom Layer w0.254: v3(93.307,149.328) 96.696,149.328 109.703,136.322 109.703,130.683 112.852,127.533 120.955,127.533 129.565,118.923 129.565,113.386 131.113,111.838 P5.17@137.478,111.838 ; 93.604,149.328 cw(c93.604,149.625) 93.394,149.415 ccw(c93.604,149.625) 93.604,149.328 ; 93.604,149.328 ccw(c93.604,149.031) 93.394,149.241 cw(c93.604,149.031) 93.604,149.328 ; 135.793,111.838 cw(c135.793,110.153) 136.984,111.344 ccw(c135.793,110.153) 135.793,111.838 ; 135.793,111.838 ccw(c135.793,113.523) 136.984,112.332 cw(c135.793,113.523) 135.793,111.838 ; 136.406,111.838 cw(c136.406,110.766) 137.164,111.524 ccw(c136.406,110.766) 136.406,111.838 ; 136.406,111.838 ccw(c136.406,112.91) 137.164,112.152 cw(c136.406,112.91) 136.406,111.838
U2-EN: P5.11 U2.11 | length 84.9
  Top Layer w0.254: U2.11@84.634,148.282 91.208,148.282 92.596,149.67 v3(92.596,150.421) ; v3(130.572,113.54) 136.491,119.458 ; P5.11@137.478,119.458 136.491,119.458 ; 92.596,150.124 cw(c92.893,150.124) 92.683,150.334 ccw(c92.893,150.124) 92.596,150.124 ; 92.596,150.124 ccw(c92.299,150.124) 92.509,150.334 cw(c92.299,150.124) 92.596,150.124 ; 130.782,113.75 cw(c130.572,113.96) 130.572,113.663 ccw(c130.572,113.96) 130.782,113.75 ; 130.782,113.75 ccw(c130.992,113.54) 130.695,113.54 cw(c130.992,113.54) 130.782,113.75 ; 136.491,119.458 cw(c136.491,119.109) 136.82,119.225 ccw(c136.491,119.109) 136.491,119.458 ; 136.491,119.458 ccw(c136.491,119.807) 136.82,119.691 cw(c136.491,119.807) 136.491,119.458
  Bottom Layer w0.254: v3(92.596,150.421) 98.296,150.421 110.388,138.328 110.388,130.912 113.132,128.168 121.361,128.168 130.572,118.957 v3(130.572,113.54) ; 92.893,150.421 cw(c92.893,150.718) 92.683,150.508 ccw(c92.893,150.718) 92.893,150.421 ; 92.893,150.421 ccw(c92.893,150.124) 92.683,150.334 cw(c92.893,150.124) 92.893,150.421 ; 130.572,113.837 cw(c130.275,113.837) 130.485,113.627 ccw(c130.275,113.837) 130.572,113.837 ; 130.572,113.837 ccw(c130.869,113.837) 130.659,113.627 cw(c130.869,113.837) 130.572,113.837
U2-RESET: P5.23 U2.21 | length 100
  Top Layer w0.254: U2.21@88.484,143.932 88.484,139.953 v3(88.991,139.447) ; v1(94.31,130.962) 105.054,130.962 108.687,127.33 122.403,127.33 125.324,124.409 125.324,102.91 127.724,100.51 133.77,100.51 P5.23@137.478,104.218 ; 88.781,139.657 cw(c88.571,139.447) 88.868,139.447 ccw(c88.571,139.447) 88.781,139.657 ; 88.781,139.657 ccw(c88.991,139.867) 88.991,139.57 cw(c88.991,139.867) 88.781,139.657 ; 94.969,130.962 cw(c94.969,131.621) 94.503,131.155 ccw(c94.969,131.621) 94.969,130.962 ; 94.969,130.962 ccw(c94.969,130.303) 94.503,130.769 cw(c94.969,130.303) 94.969,130.962 ; 136.286,103.026 cw(c137.478,101.835) 137.478,103.52 ccw(c137.478,101.835) 136.286,103.026 ; 136.286,103.026 ccw(c135.095,104.218) 136.78,104.218 cw(c135.095,104.218) 136.286,103.026 ; 136.72,103.46 cw(c137.478,102.702) 137.478,103.774 ccw(c137.478,102.702) 136.72,103.46 ; 136.72,103.46 ccw(c135.962,104.218) 137.034,104.218 cw(c135.962,104.218) 136.72,103.46
  Bottom Layer w0.254: v3(88.991,139.447) 94.31,134.127 v1(94.31,130.962) ; 89.2,139.237 cw(c89.41,139.447) 89.114,139.447 ccw(c89.41,139.447) 89.2,139.237 ; 89.2,139.237 ccw(c88.991,139.027) 88.991,139.324 cw(c88.991,139.027) 89.2,139.237 ; 94.31,131.621 cw(c93.651,131.621) 94.117,131.155 ccw(c93.651,131.621) 94.31,131.621 ; 94.31,131.621 ccw(c94.969,131.621) 94.503,131.155 cw(c94.969,131.621) 94.31,131.621
U2-RTS: P5.19 U2.45 | length 80.4
  Top Layer w0.254: U2.45@95.834,151.782 97.561,151.782 97.953,152.173 v3(98.921,152.173) ; 98.624,152.173 cw(c98.624,151.876) 98.834,152.086 ccw(c98.624,151.876) 98.624,152.173 ; 98.624,152.173 ccw(c98.624,152.47) 98.834,152.26 cw(c98.624,152.47) 98.624,152.173
  Bottom Layer w0.254: v3(98.921,152.173) 98.921,151.207 111.15,138.977 111.15,131.089 113.386,128.854 121.717,128.854 134.137,116.434 134.137,114.122 135.153,113.106 138.201,113.106 138.76,112.547 138.76,110.58 P5.19@137.478,109.298 ; 98.921,151.876 cw(c99.218,151.876) 99.008,152.086 ccw(c99.218,151.876) 98.921,151.876 ; 98.921,151.876 ccw(c98.624,151.876) 98.834,152.086 cw(c98.624,151.876) 98.921,151.876 ; 138.236,110.056 cw(c137.478,110.814) 137.478,109.742 ccw(c137.478,110.814) 138.236,110.056 ; 138.236,110.056 ccw(c138.994,109.298) 137.922,109.298 cw(c138.994,109.298) 138.236,110.056 ; 138.67,110.49 cw(c137.478,111.681) 137.478,109.996 ccw(c137.478,111.681) 138.67,110.49 ; 138.67,110.49 ccw(c139.861,109.298) 138.176,109.298 cw(c139.861,109.298) 138.67,110.49
U2-RXD: P5.15 U2.43 | length 72.5
  Top Layer w0.254: U2.43@95.834,150.782 97.555,150.782 98.26,151.487 102.934,151.487 v3(104.56,149.862) ; 104.35,150.072 cw(c104.14,149.862) 104.437,149.862 ccw(c104.14,149.862) 104.35,150.072 ; 104.35,150.072 ccw(c104.56,150.282) 104.56,149.985 cw(c104.56,150.282) 104.35,150.072
  Bottom Layer w0.254: v3(104.56,149.862) 117.246,137.175 117.246,131.267 118.516,129.997 121.666,129.997 134.925,116.738 134.925,114.708 135.255,114.378 P5.15@137.478,114.378 ; 104.77,149.652 cw(c104.98,149.862) 104.683,149.862 ccw(c104.98,149.862) 104.77,149.652 ; 104.77,149.652 ccw(c104.56,149.442) 104.56,149.739 cw(c104.56,149.442) 104.77,149.652 ; 135.793,114.378 cw(c135.793,112.693) 136.984,113.884 ccw(c135.793,112.693) 135.793,114.378 ; 135.793,114.378 ccw(c135.793,116.063) 136.984,114.872 cw(c135.793,116.063) 135.793,114.378 ; 136.406,114.378 cw(c136.406,113.306) 137.164,114.064 ccw(c136.406,113.306) 136.406,114.378 ; 136.406,114.378 ccw(c136.406,115.45) 137.164,114.692 cw(c136.406,115.45) 136.406,114.378
U2-SLEEP: P5.21 U2.22 | length 83.8
  Top Layer w0.254: U2.22@88.984,143.932 88.984,141.801 90.314,140.471 90.314,138.794 92.81,136.298 97.208,136.298 v3(97.231,136.322) ; 96.877,136.298 ccw(c96.877,136.676) 97.144,136.409 cw(c96.877,136.676) 96.877,136.298
  Bottom Layer w0.254: v3(97.231,136.322) 100.101,136.322 102.692,133.731 105.308,133.731 107.461,131.579 107.461,129.293 110.566,126.187 120.371,126.187 126.797,119.761 126.797,109.322 127.965,108.153 132.334,108.153 133.729,106.758 P5.21@137.478,106.758 ; 97.528,136.322 cw(c97.528,136.619) 97.318,136.409 ccw(c97.528,136.619) 97.528,136.322 ; 97.528,136.322 ccw(c97.528,136.025) 97.318,136.235 cw(c97.528,136.025) 97.528,136.322 ; 135.793,106.758 cw(c135.793,105.073) 136.984,106.264 ccw(c135.793,105.073) 135.793,106.758 ; 135.793,106.758 ccw(c135.793,108.443) 136.984,107.252 cw(c135.793,108.443) 135.793,106.758 ; 136.406,106.758 cw(c136.406,105.686) 137.164,106.444 ccw(c136.406,105.686) 136.406,106.758 ; 136.406,106.758 ccw(c136.406,107.83) 137.164,107.072 cw(c136.406,107.83) 136.406,106.758
U2-TXD: P5.13 R4.1 | length 67.7
  Top Layer w0.254: R4.1@100.976,150.444 v3@101.943,150.444 ; v3(101.945,150.446) v3@101.943,150.444 ; v3@101.943,150.444 cw(c101.943,151.197) 101.349,150.735 ccw(c101.943,151.197) v3@101.943,150.444 ; v3@101.943,150.444 ccw(c101.943,149.692) 101.349,150.154 cw(c101.943,149.692) v3@101.943,150.444 ; 101.644,150.444 ccw(c101.644,150.747) 101.858,150.533 cw(c101.644,150.747) 101.644,150.444 ; 101.653,150.444 cw(c101.653,150.153) 101.858,150.359 ccw(c101.653,150.153) 101.653,150.444
  Bottom Layer w0.254: v3(101.945,150.446) 105.957,150.446 117.856,138.547 117.856,131.699 118.796,130.759 121.952,130.759 135.793,116.918 ; P5.13@137.478,116.918 135.793,116.918 ; 102.242,150.446 cw(c102.242,150.743) 102.032,150.533 ccw(c102.242,150.743) 102.242,150.446 ; 102.242,150.446 ccw(c102.242,150.149) 102.032,150.359 cw(c102.242,150.149) 102.242,150.446 ; 135.793,116.918 cw(c135.793,115.233) 136.984,116.424 ccw(c135.793,115.233) 135.793,116.918 ; 135.793,116.918 ccw(c135.793,118.603) 136.984,117.412 cw(c135.793,118.603) 135.793,116.918 ; 136.406,116.918 cw(c136.406,115.846) 137.164,116.604 ccw(c136.406,115.846) 136.406,116.918 ; 136.406,116.918 ccw(c136.406,117.99) 137.164,117.232 cw(c136.406,117.99) 136.406,116.918
VBAT: U2.1
pads on no net: H1.0 H2.0 H3.0 H4.0 J5.1 J5.2 J6.1 J6.2 J7.1 J7.2 J8.1 J8.2 P6.3 U2.14 U2.34 U2.35 U2.36 U7.7

## Polygon pours and split planes (outlines as drawn)
GND on Top Layer "Top Layer-GND" (solid, remove dead copper, pour order 1004): 37.643,111.938 27.915,111.938 25.629,109.652 -3.898,109.652 -4,109.753 -4,207.002 0,211.002 151.997,211.002 155.999,207 155.999,135.052 37.77,135.052 37.643,134.925
GND-A12V on Top Layer "Top Layer-GND-A12V" (solid, remove dead copper, pour order 1001): 3.734,168.021 8.28,168.021 8.28,164.338 8.331,164.287 29.439,164.287 29.54,164.186 29.54,161.874 40.132,151.282 40.132,136.449 40.208,136.373 13.335,136.373 8.382,141.326 8.382,159.817 8.306,159.893 6.299,159.893 3.708,162.484
AGND on Top Layer "Top Layer-AGND" (solid, remove dead copper, pour order 1002): 55.804,157.277 63.83,157.277 63.957,157.15 63.957,153.441 67.996,149.403 68.453,148.946 75.565,148.946 75.565,143.129 74.778,142.342 74.244,141.808 66.142,141.808 66.015,141.808 62.865,138.659 59.436,138.659 59.385,138.709 59.385,146.355 58.75,146.99 57.353,148.387 55.778,148.387
GND on Bottom Layer "Bottom Layer-GND" (solid, remove dead copper, pour order 1004): 37.643,111.938 27.915,111.938 25.629,109.652 -3.898,109.652 -4,109.753 -4,207.002 0,211.002 151.997,211.002 155.999,207 155.999,135.052 37.77,135.052 37.643,134.925
GND-A12V on Bottom Layer "Bottom Layer-GND-A12V" (solid, remove dead copper, pour order 1000): 3.734,168.021 8.28,168.021 8.28,164.338 8.331,164.287 29.439,164.287 29.54,164.186 29.54,161.874 40.132,151.282 40.132,136.449 40.208,136.373 13.335,136.373 8.382,141.326 8.382,159.817 8.306,159.893 6.299,159.893 3.708,162.484
AGND on Bottom Layer "Bottom Layer-AGND" (solid, remove dead copper, pour order 1003): 55.804,157.277 63.83,157.277 63.957,157.15 63.957,153.441 67.996,149.403 68.453,148.946 75.565,148.946 75.565,143.129 74.778,142.342 74.244,141.808 66.142,141.808 66.015,141.808 62.865,138.659 59.436,138.659 59.385,138.709 59.385,146.355 58.75,146.99 57.353,148.387 55.778,148.387

## Keep-outs
Keep-Out Layer:
  lines w0.2: 2.667,86.131 cw(c2.667,86.731) 2.667,87.331 17.672,87.331 cw(c17.672,86.731) 17.672,86.131 2.667,86.131 ; 2.972,73.228 ccw(c3.572,73.228) 4.172,73.228 4.172,76.937 ccw(c3.572,76.937) 2.972,76.937 2.972,73.228 ; 6.68,78.08 cw(c7.104,78.504) 7.529,78.928 10.45,76.007 cw(c10.025,75.583) 9.601,75.159 6.68,78.08 ; 24.241,74.752 ccw(c24.841,74.752) 25.441,74.752 25.441,80.102 ccw(c24.841,80.102) 24.241,80.102 24.241,74.752 ; 27.558,74.752 ccw(c28.158,74.752) 28.758,74.752 28.758,80.102 ccw(c28.158,80.102) 27.558,80.102 27.558,74.752 ; 37.033,69.504 ccw(c37.633,69.504) 38.233,69.504 38.233,81.204 ccw(c37.633,81.204) 37.033,81.204 37.033,69.504
  lines w0.254: -4.002,0 ccw(c0,0) 0,-4.002 ; -4.002,207 cw(c0,207) 0,211.002 152,211.002 cw(c152,207) 156.002,207 ; -4,0 -4,207 ; 0,-4 152,-4 ; 152,-4.002 ccw(c152,0) 156.002,0 ; 155.999,0 155.999,207

## Other copper
Top Layer:
  rectangle: 126.416,90.957 129.032,92.304
  rectangle: 58.166,139.878 60.477,141.503
  rectangle: 75.863,36.703 78.435,38.488
  rectangle: 2.718,164.846 4.706,166.345
  rectangle net +12V: 5.41,131.928 8.103,148.463
  rectangle net GND: 1.422,167.996 9.931,171.171
  rectangle net NetC17_1: 126.797,176.352 145.263,188.874
  rectangle net GND: 16.688,170.332 21.387,175.235
  rectangle net GND: 8.331,164.287 31.75,172.161
  rectangle net NetJ3_2: 127.051,170.434 128.473,173.634
  rectangle net +3V3: 119.609,161.163 126.492,173.507
  rectangle net +12V: 3.251,131.572 7.176,150.444
  region net NetC12_2: 17.018,197.714 16.993,184.76 17.145,184.607 18.237,184.607 18.898,184.048 18.872,179.959 16.713,179.934 15.926,180.721 0.584,180.721 0.66,185.217 3.2,187.63 13.132,197.714
  region net PE: 76.073,22.758 73.355,20.041 73.355,19.939 78.918,19.939 79.121,19.736
  region net NetC12_1: 19.304,184.531 20.828,184.531 24.384,180.975 24.384,180.213 23.927,179.832 22.606,179.832 22.606,180.594 21.387,180.594 20.701,181.254 19.304,181.254
  region net +12V: 29.007,177.622 29.68,177.635 31.56,177.635 31.56,179.236 30.62,180.175 25.273,180.188 24.689,179.4 24.689,178.562 25.933,178.562 25.857,177.673
  region net PE: 82.741,20.257 70.422,20.257 69.66,19.495 69.66,7.684 70.676,6.668 82.868,6.668 83.503,7.303 83.503,19.368
  region net N-OUT: 58.865,37.402 65.469,37.402 67.12,35.751 67.12,25.972 61.024,19.876 61.024,10.224 56.325,5.525 51.245,5.525 49.594,7.176 49.594,21.908 57.087,29.401 57.087,35.116
  region net L1-IN: 0.953,40.196 6.541,40.196 13.78,32.957 13.78,24.194 17.717,20.257 17.717,7.43 16.701,6.16 14.161,6.16 9.843,10.351 7.176,10.351 6.033,11.367 6.033,17.336 3.493,19.876 3.366,30.925 -1.206,35.243 -1.206,38.037
  region net L1-OUT: 19.368,32.449 19.368,27.496 22.797,20.765 22.797,7.684 24.321,6.287 29.274,6.287 30.798,7.557 30.671,33.338 30.671,35.116 29.02,37.021 23.813,37.021
  region net N-IN: 36.64,8.065 36.576,36.068 44.704,36.068 45.784,35.116 47.816,32.83 47.816,29.274 44.895,26.734 44.895,6.414 38.418,6.414
  region net L2-IN: 89.853,34.989 87.325,32.461 87.313,29.147 87.313,25.464 92.139,20.638 92.139,11.621 93.155,10.605 95.441,10.605 99.759,6.287 103.061,6.287 103.95,7.303 103.95,23.051 93.282,34.989
  region net L2-OUT: 109.03,7.557 110.3,6.287 114.999,6.287 116.904,8.065 116.904,17.209 118.555,18.987 118.555,32.195 112.332,38.291 108.522,38.291 106.236,36.132 106.236,30.29 109.03,27.496
  region net L3-IN: 133.668,7.176 132.779,6.287 128.969,6.287 124.778,10.478 123.381,10.478 122.492,11.24 122.492,14.034 123.254,14.796 124.27,14.796 124.27,30.798 128.334,34.862 132.398,34.862 133.668,33.592
  region net L3-OUT: 139.383,7.176 140.399,6.287 147.003,6.287 152.464,11.621 152.464,35.37 150.559,37.148 146.876,37.148 139.383,29.655
  region net NetC18_1: 29.02,192.215 29.02,185.992 31.941,183.071 34.925,180.34 38.608,180.34 38.672,178.626 33.592,178.626 32.766,179.324 31.115,180.721 25.908,180.721 21.019,185.738 21.006,197.815 29.032,197.841
  pour cut-out: 12.467,198.227 25.507,198.227 25.507,185.186 25.527,185.166 12.658,185.166 12.467,185.187
  region net +5V: 29.413,189.052 29.413,193.472 33.401,197.46 39.599,197.46 42.113,195.758 43.256,195.758 43.993,194.97 43.942,192.075 43.536,191.491 42.418,191.465 40.818,191.745 34.417,191.745 34.036,191.364 34.036,189.052
  region net +5V: 114.122,188.163 113.106,189.052 113.132,194.335 113.944,194.92 117.526,194.92 122.276,190.17 120.294,188.112
Bottom Layer:
  rectangle net GND: 8.306,164.262 31.75,172.263
  rectangle net +3V3: 119.659,168.046 126.619,173.507
  rectangle net +12V: 25.248,177.597 31.572,180.188
  region net N-IN: 15.977,64.389 21.718,69.47 22.972,69.47 22.972,62.977 22.377,62.382
  region net NetC42_1: 20.244,124.866 20.93,124.003 20.955,122.504 20.955,119.786 19.329,118.161 12.014,118.161 7.645,113.792 7.645,99.466 14.173,92.939 14.173,89.992 13.081,88.9 6.172,88.9 0.178,94.386 0.152,121.26 3.251,124.841
  region net GND: 12.573,99.212 28.6,112.039 36.805,112.039 37.643,112.979 37.643,115.849 36.881,116.561 12.751,116.561 9.373,113.182 9.373,100.076 10.109,99.212
  region net N-IN: 36.64,8.065 36.576,36.068 44.704,36.068 45.784,35.116 47.816,32.83 47.816,29.274 44.895,26.734 44.895,6.414 38.418,6.414
  region net PE: 82.741,20.257 70.422,20.257 69.66,19.495 69.66,7.684 70.676,6.668 82.868,6.668 83.503,7.303 83.503,19.368
  region net N-OUT: 58.865,37.402 65.469,37.402 67.12,35.751 67.12,25.972 61.024,19.876 61.024,10.224 56.325,5.525 51.245,5.525 49.594,7.176 49.594,21.908 57.087,29.401 57.087,35.116
  region net L1-IN: 0.953,40.196 6.541,40.196 13.78,32.957 13.78,24.194 17.717,20.257 17.717,7.43 16.701,6.16 14.161,6.16 9.843,10.351 7.176,10.351 6.033,11.367 6.033,17.336 3.493,19.876 3.366,30.925 -1.206,35.243 -1.206,38.037
  region net L1-OUT: 19.368,32.449 19.368,27.496 22.797,20.765 22.797,7.684 24.321,6.287 29.274,6.287 30.798,7.557 30.671,33.338 30.671,35.116 29.02,37.021 23.813,37.021
  region net L2-IN: 89.853,34.989 87.186,32.322 87.313,29.147 87.313,25.464 92.139,20.638 92.139,11.621 93.155,10.605 95.441,10.605 99.759,6.287 103.061,6.287 103.95,7.303 103.95,23.051 93.282,34.989
  region net L2-OUT: 109.03,7.557 110.3,6.287 114.999,6.287 116.904,8.065 116.904,17.209 118.555,18.987 118.555,32.195 112.332,38.291 108.522,38.291 106.236,36.132 106.236,30.29 109.03,27.496
  region net L3-IN: 133.668,7.176 132.779,6.287 128.969,6.287 124.778,10.478 123.381,10.478 122.492,11.24 122.492,14.034 123.254,14.796 124.27,14.796 124.27,30.798 128.334,34.862 132.398,34.862 133.668,33.592
  region net L3-OUT: 139.383,7.176 140.399,6.287 147.003,6.287 152.464,11.621 152.464,35.37 150.559,37.148 146.876,37.148 139.383,29.655
  pour cut-out: 12.467,198.227 25.507,198.227 25.507,185.186 25.527,185.166 12.658,185.166 12.467,185.187
  region net +5V: 38.379,195.732 43.256,195.707 43.993,194.97 43.993,191.821 43.18,191.008 43.104,191.084 40.869,191.084 40.869,191.262 40.335,191.795 36.906,191.795 36.932,194.183
  region net +5V: 107.874,190.754 107.899,192.202 113.487,194.513 113.894,194.92 114.275,194.92 117.5,194.945 121.082,191.338 121.056,188.874 120.269,188.087 114.122,188.087 114.046,188.214 113.462,188.9
  region net +12V: 37.922,118.796 28.321,118.796 20.447,126.67 6.274,126.67 -3.048,135.992 -3.048,175.412 5.69,184.15 31.547,184.15 31.572,184.125 31.572,177.597 29.007,177.597 27.102,175.692 10.236,175.692 2.54,167.996 2.54,156.312 7.112,151.74 7.112,142.748 16.586,133.274 21.031,133.274 31.267,124.993 37.897,124.993

## Silkscreen, mask and mechanical layers (free items; w line width, h text height)
Top Overlay:
  drawing of 3759 lines, arcs and shapes, not listed
  text "GND" at 34.354,202.553 h1.52
  text "EM BTN" at 128.27,194.564 h2
  text "5V" at 28.194,192.43 h1.8
  text "EVACC_v3.1" at 111.785,77.648 h3.5
  text "2018.6.1" at 111.836,73.152 h3.5
  text "CP" at 69.596,42.799 h2
  text "CP" at 75.946,42.799 h2
  text "CT1" at 36.068,40.259 h2
  text "CT2" at 83.82,40.259 h2
  text "CT3" at 123.063,40.259 h2
  text "L1" at 18.987,-2.36 h4
  text "N" at 45.784,-2.36 h4
  text "PE" at 74.994,-2.36 h4
  text "L2" at 104.839,-2.36 h4
  text "L3" at 135.065,-2.36 h4
Bottom Overlay:
  drawing of 6826 lines, arcs and shapes, not listed
  text "GND" at 38.393,202.451 h1.52
  text "Power" at 125.476,128.981 h2
  text "Charge" at 66.954,128.905 h2
  text "Fault" at 34.493,128.829 h2
  text "Ready" at 96.164,128.829 h2
Top Solder:
  rectangle: 126.517,176.098 145.567,189.128
  rectangle: 8.077,164.059 31.953,172.441
  rectangle: 16.485,172.009 22.123,175.463
  rectangle: 120.574,168.123 125.628,170.967
Bottom Solder:
  rectangle: 8.052,164.084 31.928,172.39
  rectangle: 119.304,168.199 126.848,173.812
  region: 5.652,36.132 4.845,34.931 2.985,32.195 2.985,19.749 5.652,17.082 5.652,11.24 7.049,9.843 9.589,9.843 13.653,5.779 16.701,5.779 18.098,7.176 18.098,20.384 14.161,24.321 14.161,33.084 11.113,36.132
  region: 23.686,37.275 19.114,32.576 19.114,27.115 22.543,20.765 22.543,7.43 24.194,6.033 29.401,6.033 31.052,7.43 31.052,35.116 29.147,37.275
  region: 36.322,36.576 44.831,36.576 48.197,33.211 48.197,29.147 45.276,26.226 45.276,5.906 43.498,5.906 43.498,0.191 89.853,0.191 89.853,5.525 90.996,6.668 92.647,6.668 93.79,5.525 93.79,0.191 119.571,0.191 119.952,0.572 119.952,5.525 120.968,6.541 122.619,6.541 123.635,5.525 123.635,-0.825 121.095,-3.365 9.589,-3.365 4.128,2.096 4.128,5.398 5.271,6.541 6.795,6.541 7.811,5.525 7.811,3.747 11.367,0.191 39.815,0.191 39.815,5.906 38.418,5.906 36.132,8.192
  region: 58.738,37.91 65.596,37.91 67.501,36.005 67.501,25.845 61.405,19.749 61.405,10.224 56.325,5.144 51.245,5.144 49.213,7.176 49.213,22.162 56.706,29.655 56.706,35.243
  region: 89.853,35.37 87.059,32.576 87.059,25.337 91.885,20.511 91.885,11.494 93.028,10.351 95.314,10.351 99.632,6.033 103.188,6.033 104.204,7.049 104.204,23.178 93.282,35.37
  region: 112.586,38.545 108.268,38.545 105.982,36.259 105.982,30.036 108.776,27.242 108.776,7.557 110.3,6.033 115.126,6.033 117.158,8.065 117.158,17.209 118.809,18.86 118.809,32.449
  region: 128.334,35.116 123.991,30.798 124.016,15.05 123.127,15.05 122.238,14.161 122.238,11.24 123.254,10.224 124.778,10.224 128.969,6.033 132.906,6.033 133.922,7.049 133.922,33.719 132.525,35.116
  region: 146.749,37.656 138.875,29.782 138.875,7.049 140.145,5.779 147.257,5.779 152.845,11.367 152.845,35.624 150.813,37.656

## Text inside footprints (layer, text, board x,y; h text height)
C38: Top Overlay "+" at 146.062,135.141 h1.5 r270
C39: Top Overlay "+" at 146.062,127.419 h1.5 r270
C42: Top Overlay "+" at 10.934,126.569 h1.5 r270
C43: Top Overlay "+" at 35.318,126.569 h1.5 r270
C46: Top Overlay "+" at 115.751,200.394 h1.5 r180
P5: Top Overlay "25" at 136.728,100.478 h1.5 r270; Top Overlay "26" at 139.268,100.478 h1.5 r270; Top Overlay "1" at 136.728,133.858 h1.5 r270; Top Overlay "2" at 139.268,134.358 h1.5 r270
U9: Top Overlay "3" at 117.537,153.481 h1.5 r90; Top Overlay "1" at 121.006,153.746 h1.5 r90
U11: Top Overlay "HIECUBE" at 35.204,107.137 h3 r180